# Altium PCB NumPadPCB.PcbDoc
Units mm, origin at the board's own origin, x right, y up, seen from the top; angles counter-clockwise.
Board outline 96.75 x 127.75 mm, 2 copper layers (Top Layer, Bottom Layer); 58 components, 48 nets, 277 pads, 38 vias.
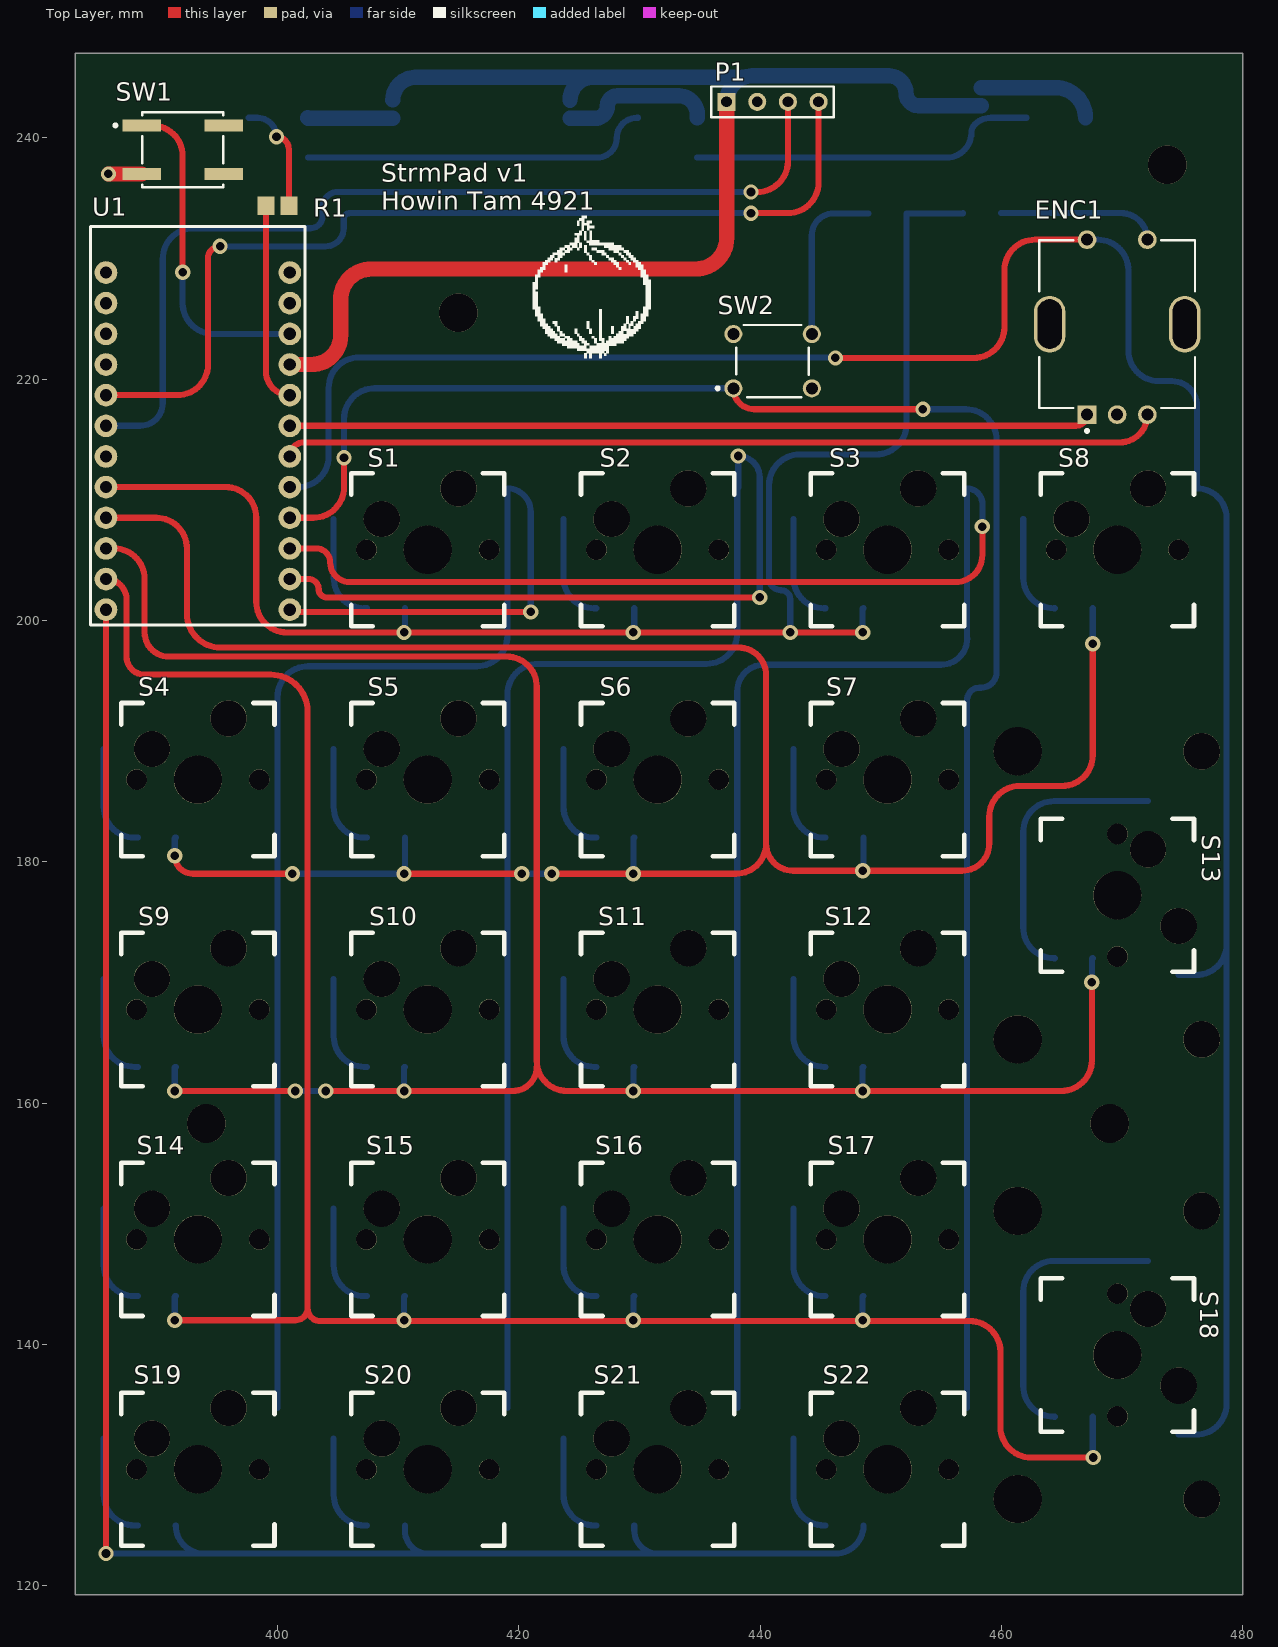
[diagram p0: Top Layer view]
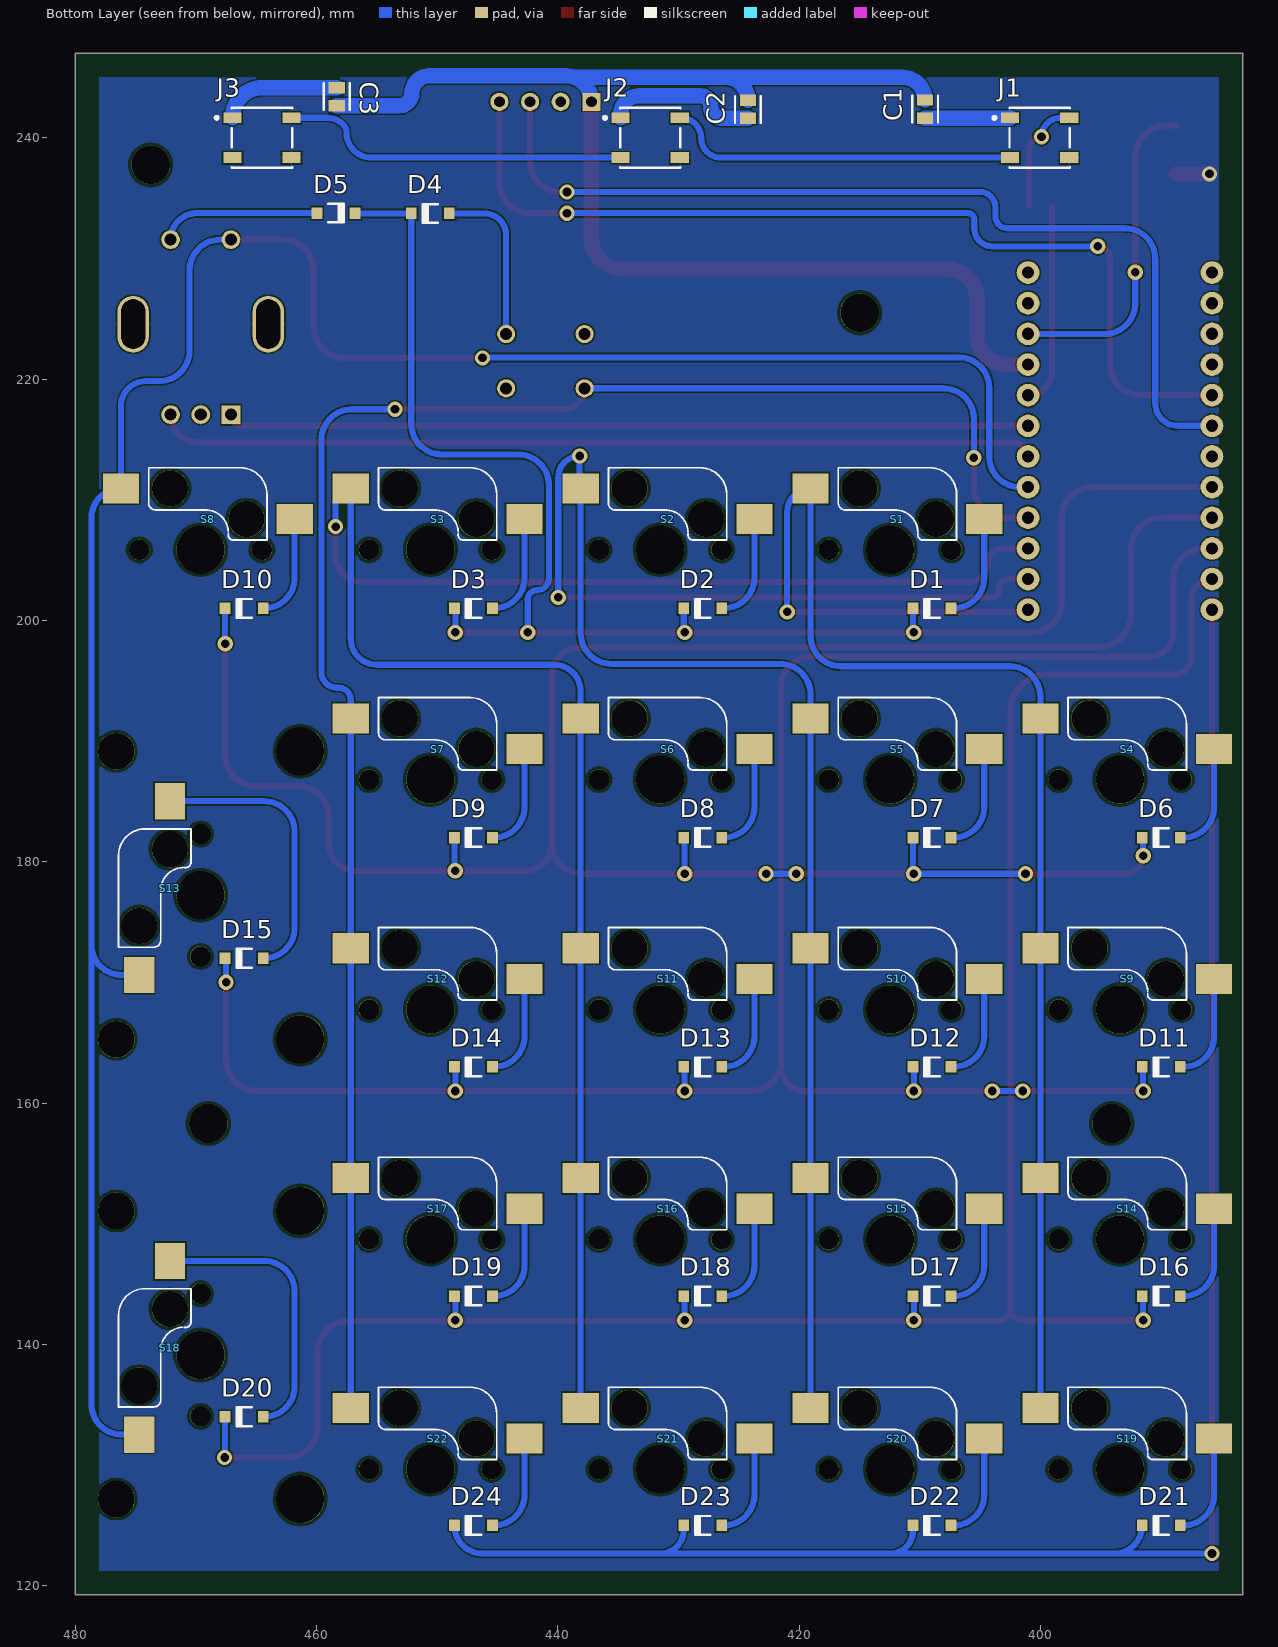
[diagram p1: Bottom Layer view, seen from below]

## Layer stack, top to bottom
Top Solder: solder mask 0.0102, Solder Resist, Dk 3.5
Top Layer: signal copper 0.0356
Dielectric 1: dielectric 0.32, FR-4, Dk 4.8
Bottom Layer: signal copper 0.0356
Bottom Solder: solder mask 0.0102, Solder Resist, Dk 3.5

## Board outline
383.25,119.25 480,119.25 480,247 383.25,247

## Design rules (kind name [scope] priority, off if disabled: settings)
BoardOutlineClearance [All] p1: gap=0.2 ignorepadtopadclearanceinfootprint=FALSE
Clearance [All] p1: gap=0.127 ignorepadtopadclearanceinfootprint=FALSE except(0.25: Arc-Hole Track-Hole SMDPad-Hole THPad-Hole Via-Hole Fill-Hole Poly-Hole Region-Hole Text-Hole)
ComponentClearance [All] p1: gap=0.127 collisioncheckmode=3 verticalgap=0.127 showdistances=TRUE
DiffPairsRouting [All] p1: maxlimit=0.254 minlimit=0.127 mostfreqgap=0.127 toplayer_minwidth=0.127 toplayer_maxwidth=25.4 toplayer_prefwidth=0.127 bottomlayer_minwidth=0.127 bottomlayer_maxwidth=25.4 bottomlayer_prefwidth=0.127 maxuncoupledlength=12.7
Height [All] p1: minheight=0 maxheight=1816.048 prefheight=12.7
HoleSize [All] p1: absolutevalues=TRUE maxlimit=6.3 minlimit=0.3 maxpercent=80.000 minpercent=20.000
HoleToHoleClearance [All] p1: gap=0.25 allowstackedmicrovias=FALSE
MinimumAnnularRing [All] p1: minimumring=0.076
MinimumSolderMaskSliver [All] p1: minsoldermaskwidth=0
PlaneClearance [All] p1: clearance=0.127
PlaneConnect PlaneConnectPowerPads [InPadClass('PowerPads')] p1: planeconnectstyle=Direct reliefexpansion=0.508 reliefentries=4 reliefconductorwidth=0.254 reliefairgap=0.254
PlaneConnect [All] p2: pad.planeconnectstyle=Relief pad.reliefexpansion=0.3 pad.reliefentries=4 pad.reliefconductorwidth=0.127 pad.reliefairgap=0.127 via.planeconnectstyle=Direct via.reliefexpansion=0.3 via.reliefentries=4 via.reliefconductorwidth=0.127 via.reliefairgap=0.127
PolygonConnect PolygonConnectPowerPads [All vs (InPadClass('PowerPads'))] p1: connectstyle=Direct reliefconductorwidth=0.254 reliefentries=4 polygonreliefangle="90 Angle" airgapwidth=0.254
PolygonConnect [All] p2: thpad.connectstyle=Relief thpad.reliefconductorwidth=0.127 thpad.reliefentries=4 thpad.polygonreliefangle="90 Angle" thpad.airgapwidth=0.127 smdpad.connectstyle=Relief smdpad.reliefconductorwidth=0.127 smdpad.reliefentries=4 smdpad.polygonreliefangle="90 Angle" smdpad.airgapwidth=0.127 via.connectstyle=Direct via.reliefconductorwidth=0.127 via.reliefentries=4 via.polygonreliefangle="90 Angle" via.airgapwidth=0.127
RoutingVias [All] p1: holewidth=0.3 width=0.6 viastyle="Through Hole" minholewidth=0.3 minwidth=0.6 maxholewidth=0.6 maxwidth=6.6
SilkToSilkClearance [All] p1: silktosilkclearance=0
SilkToSolderMaskClearance [IsPad] p1: minsilkscreentomaskgap=0.127 clearancetoexposedcopper=TRUE
SolderMaskExpansion [All] p1: expansion=0.075 istentingtop=FALSE
Width [All] p1: maxlimit=25.4 minlimit=0.127 preferedwidth=0.127 minimp=50.000000 maximp=50.000000 favimp=50.000000
20 further rules are at their usual default settings.

## Components (designator, comment, footprint, x,y, rotation, side; value= is the part's Value field where it differs from the comment)
C1 "C0805C104K5RACTU" FP-C0805C-DN-MFG 409.575,242.375 r90 bottom value="0.10 μF"
C2 "C0805C104K5RACTU" FP-C0805C-DN-MFG 424.25,242.35 r90 bottom value="0.10 μF"
C3 "C0805C104K5RACTU" FP-C0805C-DN-MFG 458.325,243.4 r270 bottom value="0.10 μF"
D1 "1N4148W-7-F" DIOD-SOD123-2_V 409,201 r0 bottom
D2 "1N4148W-7-F" DIOD-SOD123-2_V 428,201 r0 bottom
D3 "1N4148W-7-F" DIOD-SOD123-2_V 447,201 r0 bottom
D4 "1N4148W-7-F" DIOD-SOD123-2_V 450.575,233.725 r0 bottom
D5 "1N4148W-7-F" DIOD-SOD123-2_V 458.388,233.754 r180 bottom
D6 "1N4148W-7-F" DIOD-SOD123-2_V 390,182 r0 bottom
D7 "1N4148W-7-F" DIOD-SOD123-2_V 409,182 r0 bottom
D8 "1N4148W-7-F" DIOD-SOD123-2_V 428,182 r0 bottom
D9 "1N4148W-7-F" DIOD-SOD123-2_V 447,182 r0 bottom
D10 "1N4148W-7-F" DIOD-SOD123-2_V 466,201 r0 bottom
D11 "1N4148W-7-F" DIOD-SOD123-2_V 390,163 r0 bottom
D12 "1N4148W-7-F" DIOD-SOD123-2_V 409,163 r0 bottom
D13 "1N4148W-7-F" DIOD-SOD123-2_V 428,163 r0 bottom
D14 "1N4148W-7-F" DIOD-SOD123-2_V 447,163 r0 bottom
D15 "1N4148W-7-F" DIOD-SOD123-2_V 466,172 r0 bottom
D16 "1N4148W-7-F" DIOD-SOD123-2_V 390,144 r0 bottom
D17 "1N4148W-7-F" DIOD-SOD123-2_V 409,144 r0 bottom
D18 "1N4148W-7-F" DIOD-SOD123-2_V 428,144 r0 bottom
D19 "1N4148W-7-F" DIOD-SOD123-2_V 447,144 r0 bottom
D20 "1N4148W-7-F" DIOD-SOD123-2_V 466,134 r0 bottom
D21 "1N4148W-7-F" DIOD-SOD123-2_V 390,125 r0 bottom
D22 "1N4148W-7-F" DIOD-SOD123-2_V 409,125 r0 bottom
D23 "1N4148W-7-F" DIOD-SOD123-2_V 428,125 r0 bottom
D24 "1N4148W-7-F" DIOD-SOD123-2_V 447,125 r0 bottom
ENC1 "PEC12R-4225F-S0024" FP-PEC12R-4225F-S0024-MFG 469.6,224.551 r0 top
J1 "1655" ADA-RGB-1655_V 400.075,240 r180 bottom
J2 "1655" ADA-RGB-1655_V 432.35,240 r180 bottom
J3 "1655" ADA-RGB-1655_V 464.525,240 r180 bottom
P1 "Header 4" HDR1X4 437.23,242.975 r0 top
R1 "ERA6AEB511V" RESC2013X60X40ML20T25 400,234.35 r0 top
S1 "PG151101S11" SW_PG151101S11 394.05,200.008 r0 top
S2 "PG151101S11" SW_PG151101S11 413.1,200.008 r0 top
S3 "PG151101S11" SW_PG151101S11 432.15,200.008 r0 top
S4 "PG151101S11" SW_PG151101S11 375,180.958 r0 top
S5 "PG151101S11" SW_PG151101S11 394.05,180.958 r0 top
S6 "PG151101S11" SW_PG151101S11 413.1,180.958 r0 top
S7 "PG151101S11" SW_PG151101S11 432.15,180.958 r0 top
S8 "PG151101S11" SW_PG151101S11 451.2,200.008 r0 top
S9 "PG151101S11" SW_PG151101S11 375,161.908 r0 top
S10 "PG151101S11" SW_PG151101S11 394.05,161.908 r0 top
S11 "PG151101S11" SW_PG151101S11 413.1,161.908 r0 top
S12 "PG151101S11" SW_PG151101S11 432.15,161.908 r0 top
S13 "PG151101S11" SW_PG151101S11 463.773,195.632 r270 top
S14 "PG151101S11" SW_PG151101S11 375,142.858 r0 top
S15 "PG151101S11" SW_PG151101S11 394.05,142.858 r0 top
S16 "PG151101S11" SW_PG151101S11 413.1,142.858 r0 top
S17 "PG151101S11" SW_PG151101S11 432.15,142.858 r0 top
S18 "PG151101S11" SW_PG151101S11 463.773,157.532 r270 top
S19 "PG151101S11" SW_PG151101S11 375,123.808 r0 top
S20 "PG151101S11" SW_PG151101S11 394.05,123.808 r0 top
S21 "PG151101S11" SW_PG151101S11 413.1,123.808 r0 top
S22 "PG151101S11" SW_PG151101S11 432.15,123.808 r0 top
SW1 "EVQ-Q2K03W" FP-EVQ-Q2K03W-MFG 392.15,239 r0 top
SW2 "TL1105SPF160Q" ESWI-TL1105SPF_V 441.04,221.483 r0 top
U1 "ProMicro" PCBComponent_1 373.095,209.775 r0 top

## Footprints (in the part's own frame and the unit in brackets; to place one, negate y for a bottom-side part, rotate by r counter-clockwise, add the part's x,y. Pads: shape width x height; smd on the part's side, far side on the other; paste and mask are expansions set on the pad)
ADA-RGB-1655_V [mm] "SMD, 4-Leads, Body 5x5mm"
  rect 1.5x0.9 smd: 1(-2.45,1.65) 2(-2.45,-1.65) 3(2.45,-1.65) 4(2.45,1.65)
  silkscreen extent -3.88,-2.5 2.5,2.5, body extent -2.7,-2.5 2.7,2.5, height 1.68
DIOD-SOD123-2_V [mm] "SOD123, 2-Leads, Body 2.7x1.55mm, Height 1.45mm"
  rect 0.9x0.95 smd: 1(-1.575,0) 2(1.575,0)
  silkscreen extent -0.64,-0.83 0.64,0.77, body extent -1.35,-0.77 1.35,0.77, height 1.45
ESWI-TL1105SPF_V [mm] "THD, 4-Leads, Body 6x6mm"
  round 1.5 hole 1: 1(-3.25,-2.25) 2(3.25,-2.25) 3(-3.25,2.25) 4(3.25,2.25)
  silkscreen extent -4.67,-3 3,3, body extent -3.95,-3 3.95,3, height 7.4
FP-C0805C-DN-MFG [mm]
  rect 0.95x1.35 smd paste+0 mask+0: 1(-0.75,0) 2(0.75,0)
  silkscreen extent -1.1,-1.07 1.1,1.07, body extent -1,-0.63 1,0.63, height 0.88
FP-EVQ-Q2K03W-MFG [mm]
  rect 3.2x1 smd paste+0 mask+0: A(-3.4,2) A'(3.4,2) B(-3.4,-2) B'(3.4,-2)
  silkscreen extent -5.7,-3.1 3.35,3.1, body extent -5.1,-3.2 5.1,3.2, height 0.25
FP-PEC12R-4225F-S0024-MFG [mm]
  round 1.55 hole 1 paste-1000 mask+0: 1(-2.5,7) 2(2.5,7) B(2.5,-7.5) C(0,-7.5)
  rrect100% 2.6x4.7 hole 4.1 slot 2 at 0 deg paste-1000 mask+0: 3(-5.6,0) 4(5.6,0)
  rect 1.55x1.55 hole 1 paste-1000 mask+0: A(-2.5,-7.5)
  silkscreen extent -6.45,-8.97 6.45,6.95, body extent -7,-8.37 7,7.88, height 0.25
HDR1X4 [mm] "Connector; Header; 4 Position"
  rect 1.5x1.5 hole 0.9: 1(0,0)
  round 1.5 hole 0.9: 2(2.54,0) 3(5.08,0) 4(7.62,0)
  silkscreen extent -1.27,-1.27 8.89,1.27
PCBComponent_1 [mil]
  round 74 hole 40: 1(500,750) 2(500,650) 3(500,550) 4(500,450) 5(500,350) 6(500,250) 7(500,150) 8(500,50) 9(500,-50) 10(500,-150) 11(500,-250) 12(500,-350) 13(1100,-350) 14(1100,-250) 15(1100,-150) 16(1100,-50) 17(1100,50) 18(1100,150) 19(1100,250) 20(1100,350) 21(1100,450) 22(1100,550) 23(1100,650) 24(1100,750)
  silkscreen extent 450,-400 1150,900
RESC2013X60X40ML20T25 [mm] "Chip Resistor, 2-Leads, Body 2.00x1.25mm, IPC Low Density"
  rect 1.4x1.55 smd: 1(-0.95,0) 2(0.95,0)
  body extent -1.1,-0.72 1.1,0.72, height 0.6
SW_PG151101S11 [mil]
  rect 118.11x98.43 smd far side mask+2.01: 1(984.84,430) 2(417.91,330)
  round 157 hole 157 paste-157 mask+2.01: Un1(725,230)
  round 67 hole 67 paste-67 mask+2.01: Un2(525,230) Un3(925,230)
  round 118.11 hole 118.11 paste-118.11 mask+2.01: Un4(825,430) Un5(575,330)
  silkscreen extent 475,-20 975,480

## Part data
C1 C2 C3: library part CMP-2007-00279-2, "CAP CER 0.1UF 50V X7R 0805", Capacitance="0.10 μF", Manufacturer=KEMET, Package=C0805C-DN, Temperature="-55°C to +125°C", Temperature Characteristic=X7R, Temperature Coefficient=30ppm/°C, Temperature Range High=+125°C, Temperature Range Low=-55°C, Tolerance=0.1, Voltage Rating="50 V", Automotive=No, Category=Cap, ComponentLink2Description=Datasheet, ComponentLink2URL=https://content.kemet.com/datasheets/KEM_C1003_C0G_SMD.pdf, Device Class L1="Passive Components", Device Class L2=Capacitors, Device Class L3="Ceramic Capacitors", Digikey Description="CAP CER 0.1UF 50V X7R 0805", Height=0.88mm, Ipc Land Pattern Name=CAPC200125X78, Lead Free=Yes, Manufacturer Part Number=C0805C104K5RACTU, Material=Ceramic, Mouser Description="Cap Ceramic 0.1uF 50V X7R 10% SMD 2.0 x 1.2 mm 125 C Paper T/R", Octopart=https://octopart.com/c0805c104k5ractu-kemet-143926, RoHS=TRUE
D1 D2 D3 D4 D5 D6 D7 D8 D9 D10 D11 D12 D13 D14 D15 D16 D17 D18 D19 D20 D21 D22 D23 D24: library part CMP-2000-04932-2, "Fast Switching Diode, 100 V, 0.15 A, -65 to 150 degC, 2-Pin?SOD123, RoHS, Tape and Reel", If - Forward Current=0.15A, Ir - Reverse Current=1uA, Manufacturer=DiodesIncorporated, Max Surge Current=2A, Maximum Operating Temperature=+150C, Minimum Operating Temperature=-65C, Operating Temperature Range=-65Cto+150C, Package / Case=SOD-123, Package Reference=SOD123-2, Peak Reverse Voltage=100V, Vf - Forward Voltage=1.25V, Brand=DiodesIncorporated, Configuration=Single, Datasheet URL=http://www.farnell.com/datasheets/1915529.pdf, Datasheet Version="Rev. 24-2, 10/2013", Factory Pack Quantity=3000, Height=1.25mm, Length=2.85mm, Manufacturer URL=http://www.diodes.com/, Mounting Style=SMD/SMT, Package URL=http://www.diodes.com/datasheets/ds18004.pdf, Packaging=Reel, Product=SwitchingDiodes, Product Category=Diodes-GeneralPurpose,Power,Switching, Recovery Time=4ns, RoHS=True, Series=1N4148, Type=SwitchingDiode, Unit Weight=0.000353oz, Width=1.7mm
ENC1: library part CMP-07421-000041-1, "ROTARY ENCODER MECHANICAL 24PPR", Max Operating Temperature=70°C, Min Operating Temperature=-30°C, Package Quantity=75, Built in Switch=Yes, Detent=Yes, Encoder Type=Mechanical, Height=13.4mm, Hole Diameter=1mm, Length=13.4mm, Mount="Through Hole", Number of Channels=2, Orientation=Vertical, Output Type=Quadrature, Packaging=Bulk, Pulses per Revolution=24, REACH SVHC="No SVHC", RoHS Compliant=Yes, Series=PEC12R, Termination="PC Pin", Width=12.5mm
J1 J2 J3: library part CMP-2000-05026-1, "Intelligent Control LED Integrated Light Source, 3.5 to 5.3 V, -25 to 80 degC, 4-Pin SMD, RoHS, Tape and Reel", Color=Red,Green,Blue(RGB), Manufacturer=Adafruit-Industries-LLC, Package Description="4-Pin Surface Mount Device, Body 5 x 5 mm", Category=Optoelectronics, Configuration=Discrete, Controller Type=-, Datasheet URL=http://datasheet.octopart.com/ADA1655-Adafruit-Industries-datasheet-32028139.pdf, Datasheet Version=May-13, Family=Addressable,Specialty, Interface=-, Manufacturer URL=https://www.adafruit.com/, Mounting Type=SurfaceMount, Number of LEDs=10, Package Reference=1655, Series=Neopixel, Size / Dimension=5.00mmLx5.00mmW, Utilized LED=WS2812(5050)
P1: "Header, 4-Pin", LatestRevisionDate=17-Jul-2002, LatestRevisionNote="Re-released for DXP Platform.", Publisher="Altium Limited"
R1: library part CMP-2001-00648-1, Manufacturer=Panasonic, Part Number=ERA6AEB511V
S1 S2 S3 S4 S5 S6 S7 S8 S9 S10 S11 S12 S13 S14 S15 S16 S17 S18 S19 S20 S21 S22: "Keyswitch", Package=Package, Availability=Unavailable, MF=Kailh, MP=PG151101S11, Price=None, SnapEDA_Link=https://www.snapeda.com/parts/PG151101S11/Kailh/view-part/4218555/?ref=snap
SW1: library part CMP-05618-000015-1, "SWITCH TACTILE SPST-NO 0.02A 15V", Contact Current Rating=20mA, Contact Resistance=100mΩ, Manufacturer="Panasonic Electronic Components", Operating Force=1.3N, Package=0, Temperature="-40°C to +85°C", Temperature Range High=+85°C, Temperature Range Low=-40°C, Voltage Rating Dc=15V, Automotive=No, Category=Switch, ComponentLink2Description=Datasheet, ComponentLink2URL=https://industrial.panasonic.com/cdbs/www-data/pdf/ATK0000/ATK0000C360.pdf, Device Class L1=Electromechanical, Device Class L2=Switches, Device Class L3="Tactile Switches", Digikey Description="SWITCH TACTILE SPST-NO 0.02A 15V", Electromechanical Life=1000000Cycles, Height=3.3mm, Lead Free=Yes, Manufacturer Part Number=EVQ-Q2K03W, Mount="Surface Mount", Mouser Description="Tactile Switches 1.3NF 6.5x6.0x3.1mm", Octopart=https://octopart.com/evq-q2k03w-panasonic-1224370, RoHS=TRUE, Throw Configuration=SPST-NO
SW2: library part CMP-2000-07248-1, "Tact Switch, SPST-NO, 50 mA, 12 VDC, -20 to 70 degC, 4-Pin THD, RoHS, Bulk", Manufacturer=E-Switch, Package Description="4-Pin Through Hole Device, Body 6 x 6 mm", Package Reference=TL1105SPF, Actuation Force=1.6N, Actuator Style=RoundButton, Contact Material=Silver, Datasheet URL=https://www.e-switch.com/system/asset/product_line/data_sheet/140/TL1105.pdf, Datasheet Version=12/2013, Manufacturer URL=http://www.e-switch.ch/en/, Mounting Technology=ThroughHole, Package URL=http://spec_sheets.e-switch.com/specs/P010201.pdf, Size=6x6mm, Termination Style=RightAngle
U1: library part Component_1

## Free pads (board coordinates)
  round 3.2 hole 3.2: 1(415,225.5) 2(473.75,237.75) 3(394.1,158.3) 4(468.977,158.3)
  round 3.988 hole 3.988: ST1(461.36,127.179) ST1(461.36,151.055) ST1(461.36,165.279) ST1(461.36,189.155)
  round 3.048 hole 3.048: ST4(476.6,127.179) ST4(476.6,151.055) ST4(476.6,165.279) ST4(476.6,189.155)

## Via types
v1: diameter 1.27, hole 0.711, Top Layer to Bottom Layer, 38 vias

## Nets (pads, with @x,y where several pads share a name; then routed paths per layer and width w, separated by ;. In a path a pad name is that pad's centre, name@x,y a point inside that pad or via, vN(x,y) a via of type N, cw(c..) or ccw(c..) an arc to the next point about the centre after c; other vN are vias at no path point)
Col0: S1.1 S4.1 S9.1 S14.1 S19.1 U1.13 | length 124.6
  Top Layer w0.508: U1.13@401.14,200.78 U1.13 ccw(c401.22,200.885) 401.22,200.7 v1(421,200.7)
  Bottom Layer w0.508: S19.1 S14.1 S9.1 S4.1 400.015,193.658 cw(c402.555,193.658) 402.555,196.198 416.525,196.198 ccw(c416.525,198.738) 419.065,198.738 S1.1 cw(c419.065,208.995) 421,208.995 v1(421,200.7)
Col1: S2.1 S5.1 S10.1 S15.1 S20.1 U1.14 | length 148.4
  Top Layer w0.508: U1.14 402.575,203.425 cw(c402.575,202.575) 403.425,202.575 ccw(c404.1,202.575) 404.1,201.9 v1(439.975,201.9) ; v1@438.175,213.6 v1(438.2,213.625)
  Bottom Layer w0.508: S20.1 S15.1 S10.1 S5.1 419.065,193.86 cw(c421.605,193.86) 421.605,196.4 435.575,196.4 ccw(c435.575,198.94) 438.115,198.94 S2.1 438.2,211.015 v1(438.2,213.625) cw(c438.2,211.85) 439.975,211.85 v1(439.975,201.9)
Col2: S3.1 S6.1 S11.1 S16.1 S21.1 U1.15 | length 159.9
  Top Layer w0.508: U1.15 403.21,205.965 cw(c403.21,204.8) 404.375,204.8 ccw(c406,204.8) 406,203.175 456.185,203.175 ccw(c456.185,205.415) 458.425,205.415 v1(458.425,207.775)
  Bottom Layer w0.508: S21.1 S16.1 S11.1 S6.1 438.115,194.115 cw(c440.325,194.115) 440.325,196.325 455,196.325 ccw(c455,198.5) 457.175,198.5 457.165,198.5 S3.1 cw(c457.165,209.67) 458.425,209.67 v1(458.425,207.775)
Col3: S7.1 S12.1 S17.1 S22.1 SW2.1 U1.16 | length 151.3
  Top Layer w0.508: U1.16 402.985,208.505 ccw(c402.985,211.045) 405.525,211.045 v1(405.525,213.47) ; SW2.1 ccw(c439.523,219.233) 439.523,217.5 v1(453.5,217.5)
  Bottom Layer w0.508: v1@405.525,213.375 v1(405.525,213.47) 405.525,216.693 cw(c408.065,216.693) 408.065,219.233 SW2.1 ; v1(453.5,217.5) 457.06,217.5 cw(c457.06,214.96) 459.6,214.96 459.6,195.7 cw(c458.32,195.7) 458.32,194.42 458.185,194.42 ccw(c458.185,193.4) 457.165,193.4 S7.1 S12.1 S17.1 S22.1
Col4: ENC1.1 S8.1 S13.1 S18.1 U1.17 | length 197
  Top Layer w0.508: v1(446.25,221.75) 457.71,221.75 ccw(c457.71,224.29) 460.25,224.29 460.25,229.011 cw(c462.79,229.011) 462.79,231.551 ENC1.1
  Bottom Layer w0.508: U1.17 401.71,211.045 ccw(c401.71,213.585) 404.25,213.585 404.25,219.26 cw(c406.79,219.26) 406.79,221.8 446.2,221.8 cw(c446.2,221.75) v1(446.25,221.75) ; ENC1.1 467.985,231.551 cw(c467.985,229.011) 470.525,229.011 470.525,222.365 ccw(c473.065,222.365) 473.065,219.825 474.15,219.825 cw(c474.15,217.76) 476.215,217.76 S8.1 cw(c476.215,208.482) 478.663,208.482 478.663,173.126 ; S18.1 476.123,132.517 ccw(c476.123,135.057) 478.663,135.057 478.663,173.126 ; S13.1 476.154,170.617 ccw(c476.154,173.126) 478.663,173.126
En_A: ENC1.A U1.19 | length 66.6
  Top Layer w0.508: U1.19 466.174,216.125 ccw(c466.174,217.051) ENC1.A
En_B: ENC1.B U1.18 | length 73
  Top Layer w0.508: U1.18 cw(c402.2,213.585) 402.2,214.75 469.799,214.75 ccw(c469.799,217.051) ENC1.B
Encode_Out: D5.1 ENC1.2 | length 13.4
  Bottom Layer w0.508: D5.1 469.897,233.754 cw(c469.897,231.551) ENC1.2
GND: ENC1.3 ENC1.4 ENC1.C J1.3 J2.3 J3.3 P1.2 SW1.B U1.3 U1.4 U1.23 | length 2.8
  Top Layer w1.27: v1(386,237) SW1.B
LEDs: J1.4 R1.2 | length 9.5
  Top Layer w0.508: v1(399.925,240.075) cw(c399.925,239.05) 400.95,239.05 R1.2
  Bottom Layer w0.508: J1.4 398.35,241.65 cw(c398.35,240.075) v1(399.925,240.075)
NetC1_1: C1.1 J1.1 | length 7.1
  Bottom Layer w1.27: J1.1 ccw(c402.55,241.65) 402.55,241.625 C1.1
NetC2_1: C2.1 J2.1 | length 12.8
  Bottom Layer w1.27: C2.1 426.325,241.6 ccw(c426.325,242.625) 427.35,242.625 cw(c428.2,242.625) 428.2,243.475 433.25,243.475 cw(c433.25,241.925) 434.8,241.925 J2.1
NetC3_1: C3.1 J3.1 | length 10.1
  Bottom Layer w1.27: C3.1 464.475,244.15 cw(c464.475,241.65) J3.1
NetD1_1: D1.1 S1.2 | length 9.1
  Bottom Layer w0.508: S1.2 404.665,203.54 ccw(c407.205,203.54) 407.205,201 D1.1
NetD2_1: D2.1 S2.2 | length 9
  Bottom Layer w0.508: S2.2 423.715,203.54 ccw(c426.255,203.54) 426.255,201 D2.1
NetD3_1: D3.1 S3.2 | length 9
  Bottom Layer w0.508: S3.2 442.765,203.54 ccw(c445.305,203.54) 445.305,201 D3.1
NetD4_1: D4.1 SW2.4 | length 13.9
  Bottom Layer w0.508: SW2.4 444.29,231.882 ccw(c443.782,231.882) 444.29,231.889 cw(c446.095,231.92) 446.095,233.725 D4.1
NetD6_1: D6.1 S4.2 | length 9.1
  Bottom Layer w0.508: S4.2 385.615,184.54 ccw(c388.155,184.54) 388.155,182 D6.1
NetD7_1: D7.1 S5.2 | length 9
  Bottom Layer w0.508: S5.2 404.665,184.54 ccw(c407.205,184.54) 407.205,182 D7.1
NetD8_1: D8.1 S6.2 | length 9
  Bottom Layer w0.508: S6.2 423.715,184.54 ccw(c426.255,184.54) 426.255,182 D8.1
NetD9_1: D9.1 S7.2 | length 8.9
  Bottom Layer w0.508: S7.2 442.765,184.54 ccw(c445.305,184.54) 445.305,182 D9.1
NetD10_1: D10.1 S8.2 | length 8.9
  Bottom Layer w0.508: S8.2 461.815,203.54 ccw(c464.355,203.54) 464.355,201 D10.1
NetD11_1: D11.1 S9.2 | length 9
  Bottom Layer w0.508: S9.2 385.615,165.54 ccw(c388.155,165.54) 388.155,163 D11.1
NetD12_1: D12.1 S10.2 | length 9
  Bottom Layer w0.508: S10.2 404.665,165.54 ccw(c407.205,165.54) 407.205,163 D12.1
NetD13_1: D13.1 S11.2 | length 8.9
  Bottom Layer w0.508: S11.2 423.715,165.54 ccw(c426.255,165.54) 426.255,163 D13.1
NetD14_1: D14.1 S12.2 | length 8.9
  Bottom Layer w0.508: S12.2 442.765,165.54 ccw(c445.305,165.54) 445.305,163 D14.1
NetD15_1: D15.1 S13.2 | length 23.8
  Bottom Layer w0.508: D15.1 464.355,172 cw(c464.355,174.54) 461.815,174.54 461.815,182.477 cw(c464.355,182.477) 464.355,185.017 S13.2
NetD16_1: D16.1 S14.2 | length 9
  Bottom Layer w0.508: S14.2 385.615,146.54 ccw(c388.155,146.54) 388.155,144 D16.1
NetD17_1: D17.1 S15.2 | length 8.9
  Bottom Layer w0.508: S15.2 404.665,146.54 ccw(c407.205,146.54) 407.205,144 D17.1
NetD18_1: D18.1 S16.2 | length 8.9
  Bottom Layer w0.508: S16.2 423.715,146.54 ccw(c426.255,146.54) 426.255,144 D18.1
NetD19_1: D19.1 S17.2 | length 8.8
  Bottom Layer w0.508: S17.2 442.765,146.54 ccw(c445.305,146.54) 445.305,144 D19.1
NetD20_1: D20.1 S18.2 | length 23.7
  Bottom Layer w0.508: D20.1 464.355,134 cw(c464.355,136.54) 461.815,136.54 461.815,144.377 cw(c464.355,144.377) 464.355,146.917 S18.2
NetD21_1: D21.1 S19.2 | length 8.9
  Bottom Layer w0.508: S19.2 385.615,127.54 ccw(c388.155,127.54) 388.155,125 D21.1
NetD22_1: D22.1 S20.2 | length 8.9
  Bottom Layer w0.508: S20.2 404.665,127.54 ccw(c407.205,127.54) 407.205,125 D22.1
NetD23_1: D23.1 S21.2 | length 8.8
  Bottom Layer w0.508: S21.2 423.715,127.54 ccw(c426.255,127.54) 426.255,125 D23.1
NetD24_1: D24.1 S22.2 | length 8.8
  Bottom Layer w0.508: S22.2 442.765,127.54 ccw(c445.305,127.54) 445.305,125 D24.1
NetJ1_2: J1.2 J2.4 | length 29.3
  Bottom Layer w0.508: J1.2 426.5,238.35 ccw(c426.5,239.975) 428.125,239.975 cw(c429.8,239.975) 429.8,241.65 J2.4
NetJ2_2: J2.2 J3.4 | length 29.1
  Bottom Layer w0.508: J2.2 455.45,238.35 ccw(c455.45,240.417) 457.517,240.415 457.517,240.417 cw(c458.483,240.417) 457.8,241.1 cw(c459.128,239.772) 459.128,241.65 459.13,241.65 J3.4
NetR1_1: R1.1 U1.20 | length 16.8
  Top Layer w0.508: R1.1 399.05,220.65 ccw(c401.035,220.65) U1.20
RESET: SW1.A U1.22 | length 27.4
  Top Layer w0.508: SW1.A 389.65,241 cw(c389.65,238.5) 392.15,238.5 v1(392.15,228.86)
  Bottom Layer w0.508: v1(392.15,228.86) 392.15,226.285 ccw(c394.69,226.285) 394.69,223.745 U1.22
Row0: D1.2 D2.2 D3.2 D4.2 D5.2 U1.8 | length 128.3
  Top Layer w0.508: U1.8 395.71,211.045 cw(c395.71,208.505) 398.25,208.505 398.25,201.54 ccw(c400.79,201.54) 400.79,199 v1(410.5,199) v1(429.5,199) v1(442.5,199) v1(448.5,199)
  Bottom Layer w0.508: v1(410.5,199) ccw(c410.5,199.075) 410.575,199.075 D1.2 ; v1(429.5,199) ccw(c429.5,199.075) 429.575,199.075 D2.2 ; v1(442.5,199) 442.5,201.75 ccw(c441.75,201.75) 441.75,202.5 cw(c441.75,203.5) 440.75,203.5 440.75,211.21 cw(c443.29,211.21) 443.29,213.75 449.61,213.75 ccw(c449.61,216.29) 452.15,216.29 D4.2 456.784,233.725 ccw(c456.784,233.754) D5.2 ; v1(448.5,199) 448.5,200.925 cw(c448.575,200.925) D3.2
Row1: D6.2 D7.2 D8.2 D9.2 D10.2 U1.9 | length 187.1
  Top Layer w0.508: U1.9 389.96,208.505 cw(c389.96,205.965) 392.5,205.965 392.5,200.54 ccw(c395.29,200.54) 395.29,197.75 438.21,197.75 cw(c438.21,195.46) 440.5,195.46 440.5,181.5 ; v1(391.5,180.5) ccw(c393,180.5) 393,179 v1(401.25,179) ; v1(410.5,179) v1(420.25,179) ; v1(422.75,179) v1(429.5,179) 438,179 ccw(c438,181.5) 440.5,181.5 ; v1(467.575,198.075) 467.575,188.824 cw(c465.035,188.824) 465.035,186.284 461.54,186.284 ccw(c461.54,183.744) 459,183.744 459,181.5 cw(c456.75,181.5) 456.75,179.25 v1(448.5,179.25) 442.75,179.25 cw(c442.75,181.5) 440.5,181.5
  Bottom Layer w0.508: v1(391.5,180.5) 391.5,181.925 cw(c391.575,181.925) D6.2 ; v1(401.25,179) v1(410.5,179) ccw(c410.5,179.075) 410.575,179.075 D7.2 ; v1(420.25,179) v1(422.75,179) ; v1(429.5,179) 429.5,181.925 cw(c429.575,181.925) D8.2 ; v1(448.5,179.25) ccw(c448.5,179.325) 448.575,179.325 D9.2 ; v1(467.575,198.075) D10.2
Row2: D11.2 D12.2 D13.2 D14.2 D15.2 U1.10 | length 171.8
  Top Layer w0.508: U1.10 386.46,205.965 cw(c386.46,203.425) 389,203.425 389,199 ccw(c391,199) 391,197 419,197 cw(c419,194.5) 421.5,194.5 421.5,163.5 ccw(c424,163.5) 424,161 v1(429.5,161) v1(448.5,161) 464.96,161 ccw(c464.96,163.54) 467.5,163.54 v1(467.5,170) ; v1(391.5,161) v1(401.484,161) ; v1(404,161) v1(410.5,161) 419.5,161 ccw(c419.5,163) 421.5,163
  Bottom Layer w0.508: v1(391.5,161) 391.5,162.925 cw(c391.575,162.925) D11.2 ; v1(401.484,161) v1(404,161) ; v1(410.5,161) 410.5,162.925 cw(c410.575,162.925) D12.2 ; v1(429.5,161) 429.5,162.925 cw(c429.575,162.925) D13.2 ; v1(448.5,161) 448.5,162.925 cw(c448.575,162.925) D14.2 ; v1(467.5,170) 467.5,171.925 cw(c467.575,171.925) D15.2
Row3: D16.2 D17.2 D18.2 D19.2 D20.2 U1.11 | length 172.5
  Top Layer w0.508: U1.11 cw(c385.795,201.72) 387.5,201.72 387.5,197 ccw(c389,197) 389,195.5 399.46,195.5 cw(c399.46,192.46) 402.5,192.46 402.5,143 ; v1(391.5,142) 401.5,142 ccw(c401.5,143) 402.5,143 ; v1(467.625,130.625) 462.465,130.625 cw(c462.465,133.165) 459.925,133.165 459.925,139.385 ccw(c457.385,139.385) 457.385,141.925 448.5,141.925 429.5,141.925 410.5,141.925 403.575,141.925 cw(c403.575,143) 402.5,143
  Bottom Layer w0.508: v1(391.5,142) 391.5,143.925 cw(c391.575,143.925) D16.2 ; v1(410.5,142) 410.5,143.925 cw(c410.575,143.925) D17.2 ; v1(429.5,142) 429.5,143.925 cw(c429.575,143.925) D18.2 ; v1(448.5,142) 448.5,143.925 cw(c448.575,143.925) D19.2 ; D20.2 467.575,130.675 ccw(c467.625,130.675) v1(467.625,130.625)
Row4: D21.2 D22.2 D23.2 D24.2 U1.12 | length 152.9
  Top Layer w0.508: U1.12@385.76,200.92 cw(c385.76,200.885) U1.12 v1(385.795,122.665)
  Bottom Layer w0.508: v1(385.795,122.665) 393.91,122.665 ; D21.2 ccw(c393.91,125) 393.91,122.665 ; D22.2 410.575,124.555 ccw(c412.465,124.555) 412.465,122.665 ; D23.2 429.575,124.605 ccw(c431.515,124.605) 431.515,122.665 ; D24.2 cw(c446.24,125) 446.24,122.665 431.515,122.665 ; 393.91,122.665 412.465,122.665 ; 412.465,122.665 431.515,122.665
SCL: P1.3 U1.6 | length 79.4
  Top Layer w0.508: v1(439.25,235.5) 439.77,235.5 ccw(c439.77,238.04) 442.31,238.04 P1.3
  Bottom Layer w0.508: U1.6 388.625,216.125 ccw(c388.625,218) 390.5,218 390.5,229.96 cw(c393.04,229.96) 393.04,232.5 402.75,232.5 ccw(c402.75,233.5) 403.75,233.5 403.75,234.25 cw(c405,234.25) 405,235.5 v1(439.25,235.5)
SDA: P1.4 U1.5 | length 79.9
  Top Layer w0.508: U1.5 391.71,218.665 ccw(c391.71,221.205) 394.25,221.205 394.25,230 cw(c395.25,230) v1(395.25,231) ; v1(439.25,233.75) 442.31,233.75 ccw(c442.31,236.29) 444.85,236.29 P1.4
  Bottom Layer w0.508: v1(395.25,231) 404,231 ccw(c404,232.5) 405.5,232.5 405.5,233.25 cw(c406,233.25) 406,233.75 v1(439.25,233.75)
VCC: C1.2 C2.2 C3.2 P1.1 U1.21 | length 111.6
  Top Layer w1.27: U1.21 402.83,221.205 ccw(c402.83,223.625) 405.25,223.625 405.25,226.585 cw(c407.79,226.585) 407.79,229.125 434.69,229.125 ccw(c434.69,231.665) 437.23,231.665 P1.1
  Bottom Layer w1.27: C1.2 cw(c411.45,243.125) 411.45,245 426.15,245 ; C2.2 cw(c426.15,243.1) 426.15,245 ; P1.1 cw(c439.38,242.975) 438.658,245 ; C3.2 453.15,242.65 cw(c453.15,243.7) 452.1,243.7 ccw(c450.675,243.7) 450.675,245.125 439.38,245.125 ccw(c439.38,242.975) 438.658,245 ; 426.15,245 438.658,245
pads on no net: J3.2 S1.Un1 S1.Un2 S1.Un3 S1.Un4 S1.Un5 S2.Un1 S2.Un2 S2.Un3 S2.Un4 S2.Un5 S3.Un1 S3.Un2 S3.Un3 S3.Un4 S3.Un5 S4.Un1 S4.Un2 S4.Un3 S4.Un4 S4.Un5 S5.Un1 S5.Un2 S5.Un3 S5.Un4 S5.Un5 S6.Un1 S6.Un2 S6.Un3 S6.Un4 S6.Un5 S7.Un1 S7.Un2 S7.Un3 S7.Un4 S7.Un5 S8.Un1 S8.Un2 S8.Un3 S8.Un4 S8.Un5 S9.Un1 S9.Un2 S9.Un3 S9.Un4 S9.Un5 S10.Un1 S10.Un2 S10.Un3 S10.Un4 S10.Un5 S11.Un1 S11.Un2 S11.Un3 S11.Un4 S11.Un5 S12.Un1 S12.Un2 S12.Un3 S12.Un4 S12.Un5 S13.Un1 S13.Un2 S13.Un3 S13.Un4 S13.Un5 S14.Un1 S14.Un2 S14.Un3 S14.Un4 S14.Un5 S15.Un1 S15.Un2 S15.Un3 S15.Un4 S15.Un5 S16.Un1 S16.Un2 S16.Un3 S16.Un4 S16.Un5 S17.Un1 S17.Un2 S17.Un3 S17.Un4 S17.Un5 S18.Un1 S18.Un2 S18.Un3 S18.Un4 S18.Un5 S19.Un1 S19.Un2 S19.Un3 S19.Un4 S19.Un5 S20.Un1 S20.Un2 S20.Un3 S20.Un4 S20.Un5 S21.Un1 S21.Un2 S21.Un3 S21.Un4 S21.Un5 S22.Un1 S22.Un2 S22.Un3 S22.Un4 S22.Un5 SW1.A' SW1.B' SW2.2 SW2.3 U1.1 U1.2 U1.7 U1.24

## Polygon pours and split planes (outlines as drawn)
GND on Bottom Layer "GND_L02_P000" (solid, pour order 0): 385.246,245 478,245 478,121.249 385.246,121.249

## Silkscreen, mask and mechanical layers (free items; w line width, h text height)
Top Overlay:
  drawing of 10 lines, arcs and shapes, not listed
  text "StrmPad v1 / Howin Tam 4921" at 408.6,234.05 h1.52
Mechanical 1:
  the board outline again, w0.254